# Altium PCB STM32F4XXR.PcbDoc
Units mil, origin at the board's own origin, x right, y up, seen from the top; angles counter-clockwise.
Board outline not stored, 4 copper layers (Top Layer, Internal Plane 1, Internal Plane 2, Bottom Layer); 15 components, 0 nets, 94 pads, 14 vias.
Unrouted connection lines stored in the file: 12.
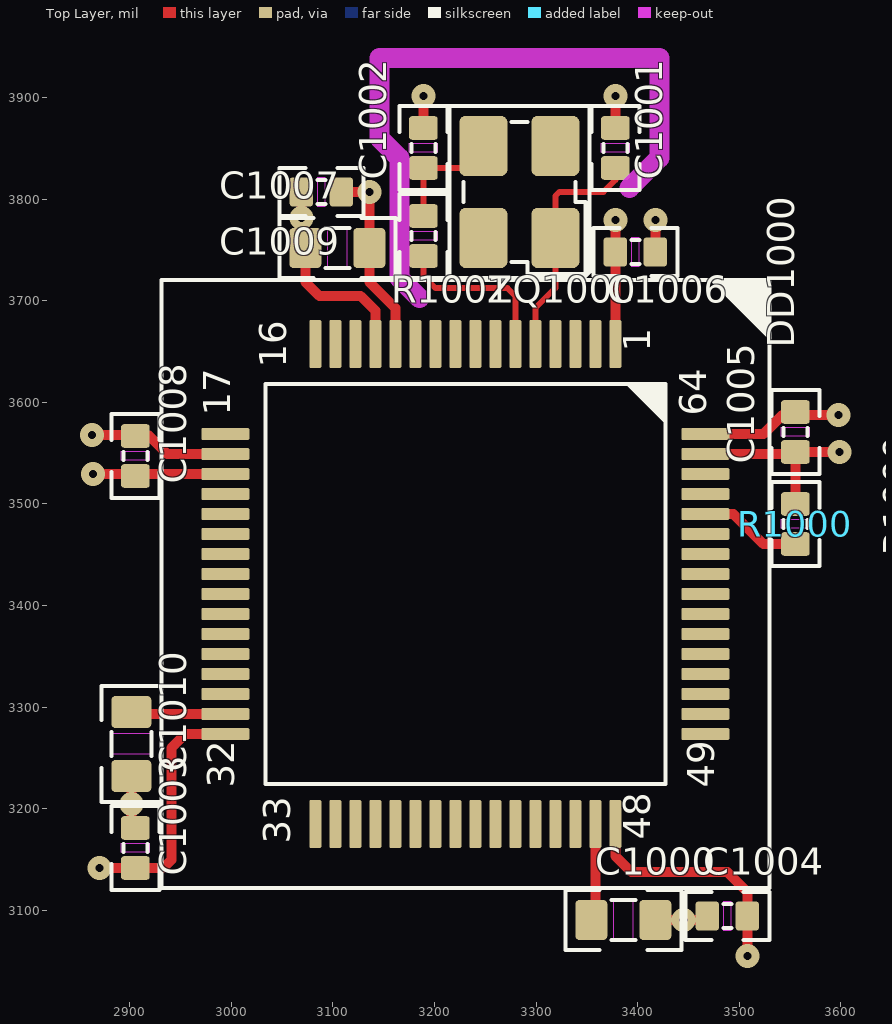
[diagram p0: Top Layer view]
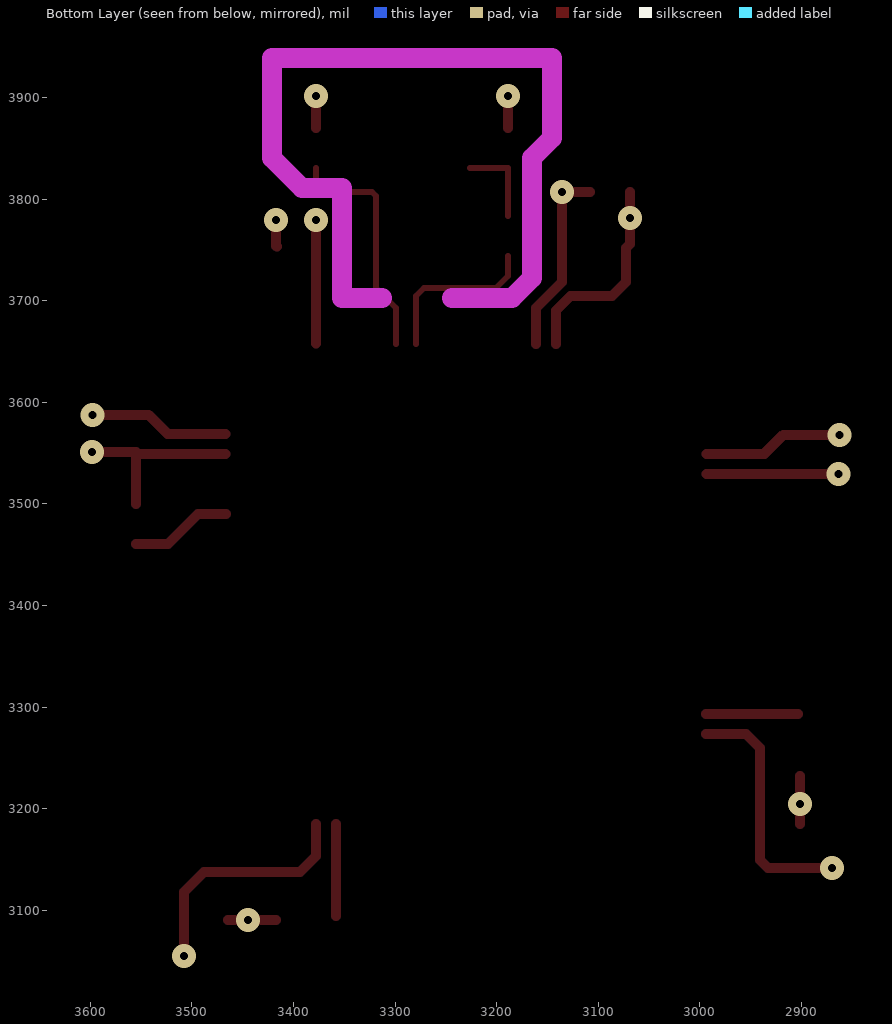
[diagram p1: Bottom Layer view, seen from below]
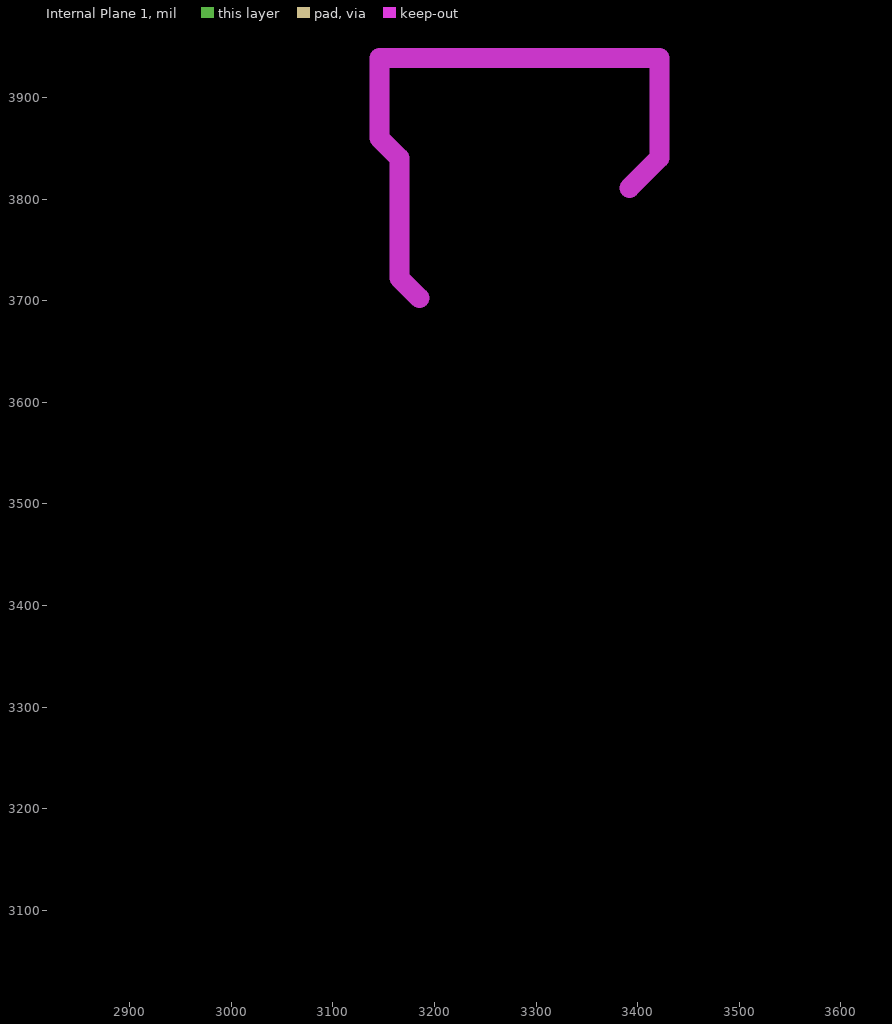
[diagram p2: Internal Plane 1, clearances drawn from the general rule]
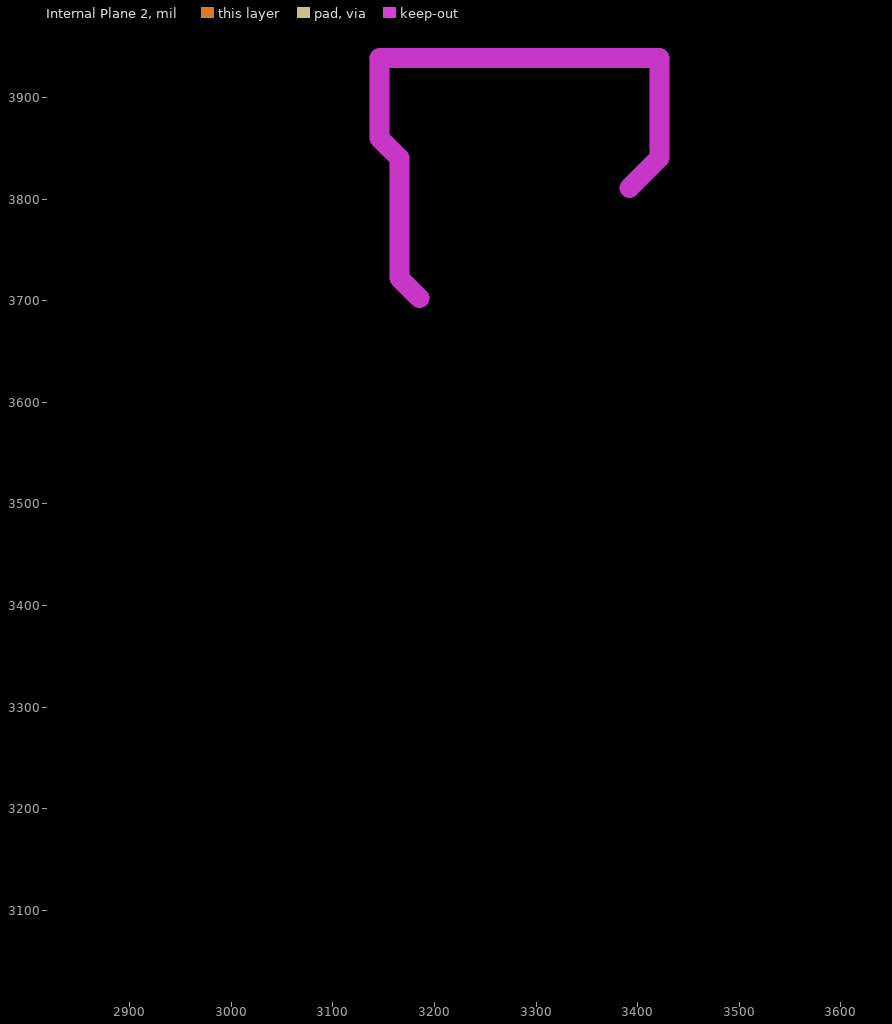
[diagram p3: Internal Plane 2, clearances drawn from the general rule]

## Layer stack, top to bottom
Top Solder: solder mask 0.4, Solder Resist, Dk 3.5
Top Layer: signal copper 1.4
Dielectric 1: dielectric 12.6, FR-4, Dk 4.8
Internal Plane 1: plane copper 1.4
Dielectric2: dielectric 12.6, FR-4, Dk 4.8
Internal Plane 2: plane copper 1.4
Dielectric3: dielectric 12.6, FR-4, Dk 4.8
Bottom Layer: signal copper 1.4
Bottom Solder: solder mask 0.4, Solder Resist, Dk 3.5

## Design rules (kind name [scope] priority, off if disabled: settings)
RoomDefinition Sheet1 [InComponentClass('Sheet1')] p1: confinementstyle=ConfineIn formatcopy=TRUE lockcomponents=FALSE outline 0,0 2000,0 2000,1000 0,1000

## Components (designator, comment, footprint, x,y, rotation, side; value= is the part's Value field where it differs from the comment)
C1000 "2,2" CAP0603 3385.83,3090.55 r0 top
C1001 "20" CAP0402 3377.95,3850.39 r90 top
C1002 "20" CAP0402 3188.98,3850.39 r270 top
C1003 "0,1" CAP0402 2905.51,3161.42 r90 top
C1004 "0,1" CAP0402 3488.19,3094.49 r180 top
C1005 "0,1" CAP0402 3555.12,3570.87 r270 top
C1006 "0,1" CAP0402 3397.64,3748.03 r0 top
C1007 "0,1" CAP0402 3088.58,3807.09 r0 top
C1008 "0,1" CAP0402 2905.51,3547.24 r90 top
C1009 "4,7" CAP0603 3104.33,3751.97 r0 top
C1010 "2,2" CAP0603 2901.57,3263.78 r270 top
DD1000 "STM32F405RGT6" LQFP64 3377.95,3657.48 r270 top
R1000 "1K" RES0402 3555.12,3480.32 r90 top
R1001 "220" RES0402 3188.98,3763.78 r270 top
ZQ1000 "12MHz" KX-7 3283.46,3807.09 r90 top

## Footprints (in the part's own frame and the unit in brackets; to place one, negate y for a bottom-side part, rotate by r counter-clockwise, add the part's x,y. Pads: shape width x height; smd on the part's side, far side on the other; paste and mask are expansions set on the pad)
CAP0402 [mm]
  rrect25% 0.59x0.72 smd: 1(-0.5,0) 2(0.5,0)
  Top Layer keep-out region: -0.1,0.36 -0.1,-0.36 0.1,-0.36 0.1,0.36
  silkscreen extent -1.05,-0.6 1.05,0.6, body extent -0.5,-0.25 0.5,0.25, height 0.49
CAP0603 [mm]
  rrect25% 0.8x1 smd: 1(-0.8,0) 2(0.8,0)
  Top Layer keep-out region: -0.25,0.5 -0.25,-0.5 0.25,-0.5 0.25,0.5
  silkscreen extent -1.45,-0.75 1.45,0.75, body extent -0.8,-0.4 0.8,0.4, height 0.65
KX-7 [mm]
  rrect25% 1.5x1.2 smd: 1(-1.15,-0.9) 2(1.15,-0.9) 3(1.15,0.9) 4(-1.15,0.9)
  silkscreen extent -2.15,-1.75 2.15,1.75, body extent -1.6,-1.25 1.6,1.25, height 1.21
LQFP64 [mm]
  rrect25% 1.2x0.3 smd: 1(0,0) 2(0,-0.5) 3(0,-1) 4(0,-1.5) 5(0,-2) 6(0,-2.5) 7(0,-3) 8(0,-3.5) 9(0,-4) 10(0,-4.5) 11(0,-5) 12(0,-5.5) 13(0,-6) 14(0,-6.5) 15(0,-7) 16(0,-7.5) 33(12,-7.5) 34(12,-7) 35(12,-6.5) 36(12,-6) 37(12,-5.5) 38(12,-5) 39(12,-4.5) 40(12,-4) 41(12,-3.5) 42(12,-3) 43(12,-2.5) 44(12,-2) 45(12,-1.5) 46(12,-1) 47(12,-0.5) 48(12,0)
  rrect25% 0.3x1.2 smd: 17(2.25,-9.75) 18(2.75,-9.75) 19(3.25,-9.75) 20(3.75,-9.75) 21(4.25,-9.75) 22(4.75,-9.75) 23(5.25,-9.75) 24(5.75,-9.75) 25(6.25,-9.75) 26(6.75,-9.75) 27(7.25,-9.75) 28(7.75,-9.75) 29(8.25,-9.75) 30(8.75,-9.75) 31(9.25,-9.75) 32(9.75,-9.75) 49(9.75,2.25) 50(9.25,2.25) 51(8.75,2.25) 52(8.25,2.25) 53(7.75,2.25) 54(7.25,2.25) 55(6.75,2.25) 56(6.25,2.25) 57(5.75,2.25) 58(5.25,2.25) 59(4.75,2.25) 60(4.25,2.25) 61(3.75,2.25) 62(3.25,2.25) 63(2.75,2.25) 64(2.25,2.25)
  silkscreen extent -1.6,-11.35 13.6,3.85, body extent 0,-9.75 12,2.25, height 1.69
RES0402 [mm]
  rrect25% 0.59x0.72 smd: 1(-0.5,0) 2(0.5,0)
  Top Layer keep-out region: -0.1,0.36 -0.1,-0.36 0.1,-0.36 0.1,0.36
  silkscreen extent -1.05,-0.6 1.05,0.6, body extent -0.5,-0.25 0.5,0.25, height 0.33

## Part data
C1000 C1009 C1010: library part CAP_0603, "Конденсатор чип", Тип компонента="Конденсатор чип", Тип корпуса=0603, Тип монтажа=Поверхностный
  C1000 C1010: Номинал=2,2
  C1009: Номинал=4,7
C1001 C1002 C1003 C1004 C1005 C1006 C1007 C1008: library part CAP_0402, "Конденсатор чип", Тип компонента="Конденсатор чип", Тип корпуса=0402, Тип монтажа=Поверхностный
  C1001 C1002: Напряжение=50V, Номинал=20
  C1003 C1004 C1005 C1006 C1007 C1008: Номинал=0,1
DD1000: library part STM32F4xxR, "Микроконтроллер", Наименование=STM32F405RGT6, Производитель=STMicroelectronics, Тип компонента=Микроконтроллер, Тип корпуса=LQFP64, Тип монтажа=Поверхностный
R1000 R1001: library part RES_0402, "Резистор чип", Тип компонента="Резистор чип", Тип корпуса=0402, Тип монтажа=Поверхностный, Характеристики="0.062Вт 50В"
  R1000: Номинал=1K
  R1001: Номинал=220
ZQ1000: library part KX-7, "Кварц", Номинал=12MHz, Производитель=Geyer, Тип компонента=Кварц, Тип корпуса=KX-7, Тип монтажа=Поверхностный

## Via types
v1: diameter 23.62, hole 7.87, Top Layer to Bottom Layer, tented both sides, 14 vias

## Nets (pads, with @x,y where several pads share a name; then routed paths per layer and width w, separated by ;. In a path a pad name is that pad's centre, name@x,y a point inside that pad or via, vN(x,y) a via of type N, cw(c..) or ccw(c..) an arc to the next point about the centre after c; other vN are vias at no path point)
pads on no net: C1000.1 C1000.2 C1001.1 C1001.2 C1002.1 C1002.2 C1003.1 C1003.2 C1004.1 C1004.2 C1005.1 C1005.2 C1006.1 C1006.2 C1007.1 C1007.2 C1008.1 C1008.2 C1009.1 C1009.2 C1010.1 C1010.2 DD1000.1 DD1000.2 DD1000.3 DD1000.4 DD1000.5 DD1000.6 DD1000.7 DD1000.8 DD1000.9 DD1000.10 DD1000.11 DD1000.12 DD1000.13 DD1000.14 DD1000.15 DD1000.16 DD1000.17 DD1000.18 DD1000.19 DD1000.20 DD1000.21 DD1000.22 DD1000.23 DD1000.24 DD1000.25 DD1000.26 DD1000.27 DD1000.28 DD1000.29 DD1000.30 DD1000.31 DD1000.32 DD1000.33 DD1000.34 DD1000.35 DD1000.36 DD1000.37 DD1000.38 DD1000.39 DD1000.40 DD1000.41 DD1000.42 DD1000.43 DD1000.44 DD1000.45 DD1000.46 DD1000.47 DD1000.48 DD1000.49 DD1000.50 DD1000.51 DD1000.52 DD1000.53 DD1000.54 DD1000.55 DD1000.56 DD1000.57 DD1000.58 DD1000.59 DD1000.60 DD1000.61 DD1000.62 DD1000.63 DD1000.64 R1000.1 R1000.2 R1001.1 R1001.2 ZQ1000.1 ZQ1000.2 ZQ1000.3 ZQ1000.4
copper on no net: | length 2532.6
  Top Layer w5.91: 3188.98,3744.09 3188.98,3724.41 3200.79,3712.6 3271.65,3712.6 3279.53,3704.72 3279.53,3657.48 ; 3188.98,3783.46 3188.98,3830.71 3226.38,3830.71 ; 3299.21,3657.48 3299.21,3692.91 3318.9,3712.6 3318.9,3761.81 3318.9,3803.15 3322.83,3807.09 3366.14,3807.09 3377.95,3818.9 3377.95,3830.71
  Top Layer w9.84: v1(2862.83,3568.07) 2917.95,3568.07 2936.65,3549.37 2993.74,3549.37 ; v1(2863.82,3529.68) 2993.74,3529.68 ; v1(2870.08,3141.73) 2905.51,3141.73 2933.07,3141.73 2940.94,3149.61 2940.94,3259.84 2954.72,3273.62 2994.09,3273.62 ; 2901.57,3185.04 v1(2901.57,3204.72) 2901.57,3232.28 ; 2903.54,3293.31 2994.09,3293.31 ; 3068.9,3807.09 v1(3068.9,3781.5) 3068.9,3755.9 3072.83,3751.97 3072.83,3718.5 3086.61,3704.72 3127.34,3704.72 3141.73,3690.33 3141.73,3657.48 ; 3108.27,3807.09 v1(3135.83,3807.09) 3135.83,3751.97 3135.83,3718.5 3161.42,3692.91 3161.42,3657.48 ; 3188.98,3870.08 v1(3188.98,3901.57) ; 3358.27,3094.49 3358.27,3185.04 ; 3377.95,3185.04 3377.95,3153.54 3393.7,3137.79 3488.19,3137.79 3507.87,3118.11 3507.87,3094.49 v1(3507.87,3055.12) ; 3377.95,3657.99 v1(3377.95,3779.53) ; 3377.95,3870.08 v1(3377.95,3901.57) ; 3416.5,3753.31 3417.32,3754.13 v1(3417.32,3779.53) ; 3417.32,3090.55 v1(3444.88,3090.55) 3464.57,3090.55 ; 3466.54,3490.16 3494.1,3490.16 3523.62,3460.63 3555.12,3460.63 ; 3466.89,3549.37 3555.12,3549.37 ; 3466.89,3569.05 3523.98,3569.05 3542.68,3587.76 v1(3597.79,3587.76) ; 3555.12,3500 3555.12,3549.37 ; v1(3598.43,3551.18) 3555.12,3551.18 3555.12,3549.37

## Keep-outs
Bottom Layer:
  lines w19.68: 3185.04,3702.76 3244.09,3702.76 ; 3312.99,3702.76 3352.36,3702.76 3352.36,3811.02 3391.73,3811.02
Multi-Layer:
  lines w19.68: 3185.04,3702.76 3165.35,3722.44 3165.35,3840.55 3145.67,3860.24 3145.67,3938.98 3165.35,3938.98 3234.25,3938.98 3391.73,3938.98 3421.26,3938.98 3421.26,3840.55 3391.73,3811.02

## Other copper
Internal Plane 1 (plane layer: these items are gaps in the copper):
  lines w19.68: 3244.09,3702.76 3185.04,3702.76 3165.35,3722.44 3165.35,3840.55 3145.67,3860.24 3145.67,3938.98 3165.35,3938.98 3234.25,3938.98 3391.73,3938.98 3421.26,3938.98 3421.26,3840.55 3391.73,3811.02 3352.36,3811.02 3352.36,3702.76 3312.99,3702.76
Internal Plane 2 (plane layer: these items are gaps in the copper):
  lines w19.68: 3175.2,3712.6 3165.35,3722.44 ; 3244.09,3702.76 3185.04,3702.76 3165.35,3722.44 ; 3312.99,3702.76 3352.36,3702.76 3352.36,3811.02 3391.73,3811.02 3421.26,3840.55 3421.26,3938.98 3391.73,3938.98 3234.25,3938.98 3165.35,3938.98 3145.67,3938.98 3145.67,3860.24 3165.35,3840.55 3165.35,3722.44

## Text inside footprints (layer, text, board x,y; h text height)
DD1000: Top Overlay "64" at 3476.38,3586.61 h45.28 r90; Top Overlay "49" at 3484.25,3220.47 h45.28 r90; Top Overlay "48" at 3421.26,3169.29 h45.28 r90; Top Overlay "33" at 3066.93,3165.35 h45.28 r90; Top Overlay "32" at 3011.81,3220.47 h45.28 r90; Top Overlay "17" at 3007.87,3586.61 h45.28 r90; Top Overlay "16" at 3062.99,3633.86 h45.28 r90; Top Overlay "1" at 3421.26,3649.61 h45.28 r90